# Altium PCB CC1200_wisun_st.PcbDoc
Units mil, origin at the board's own origin, x right, y up, seen from the top; angles counter-clockwise.
Board outline 700.67 x 1385.59 mil, 2 copper layers (Top Layer, Bottom Layer), stack 42.17 mil thick; 55 components, 39 nets, 194 pads, 83 vias.
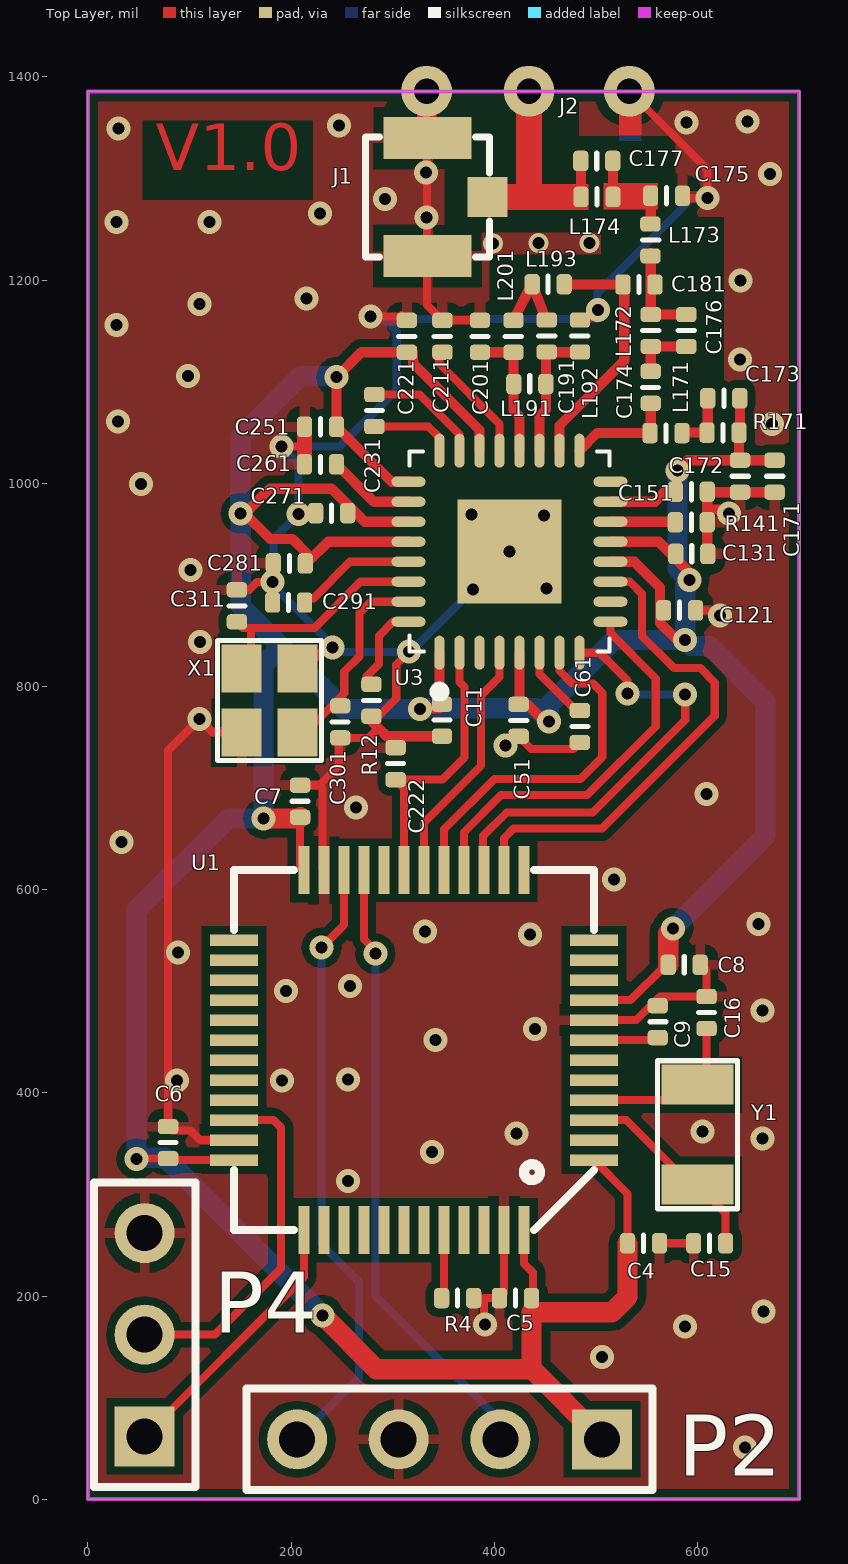
[diagram p0: Top Layer view]
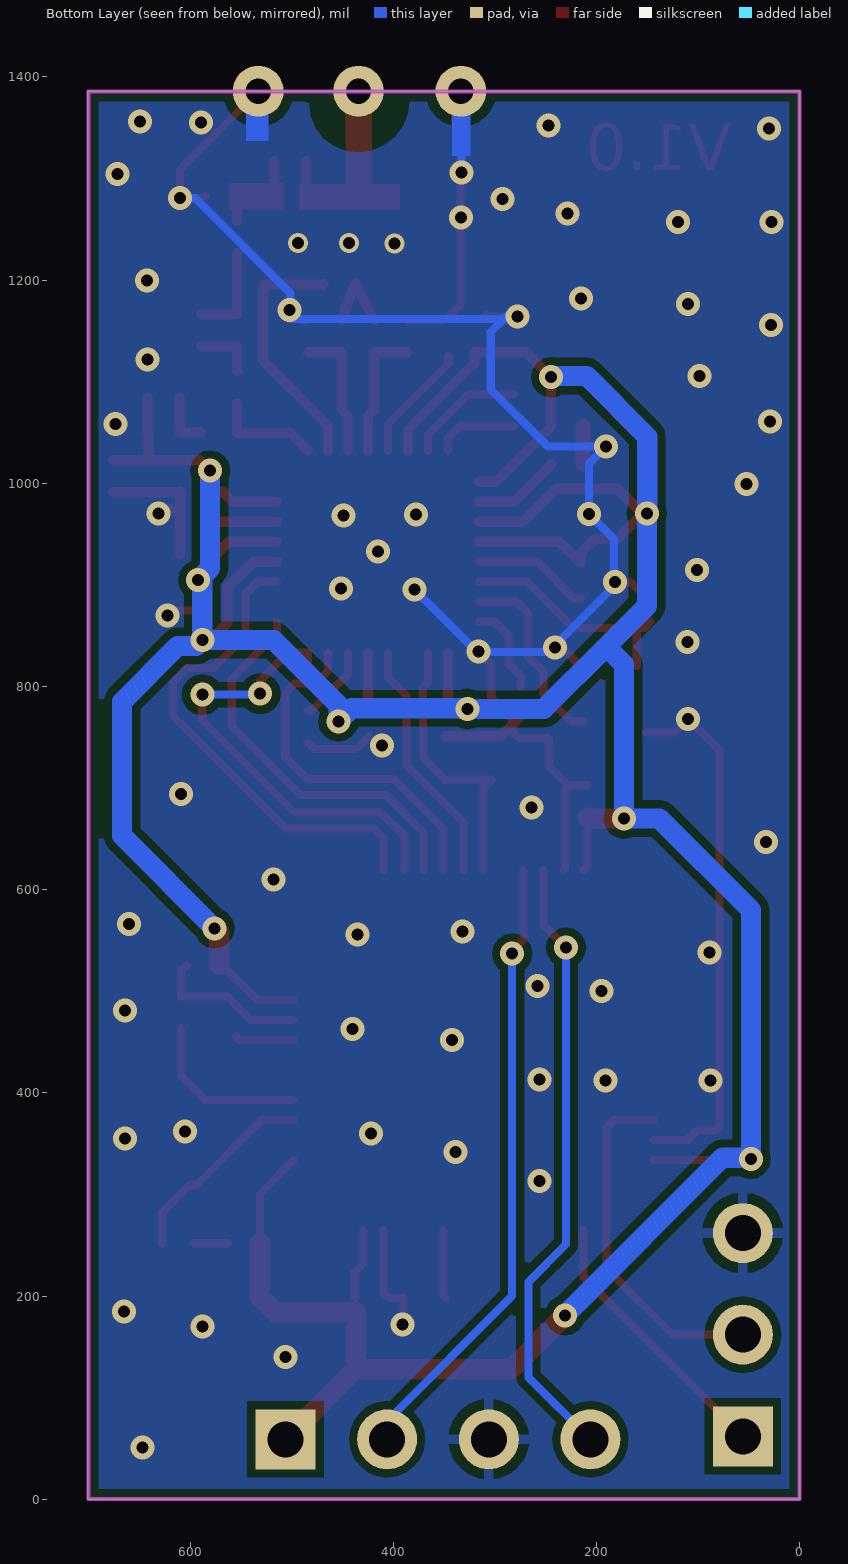
[diagram p1: Bottom Layer view, seen from below]
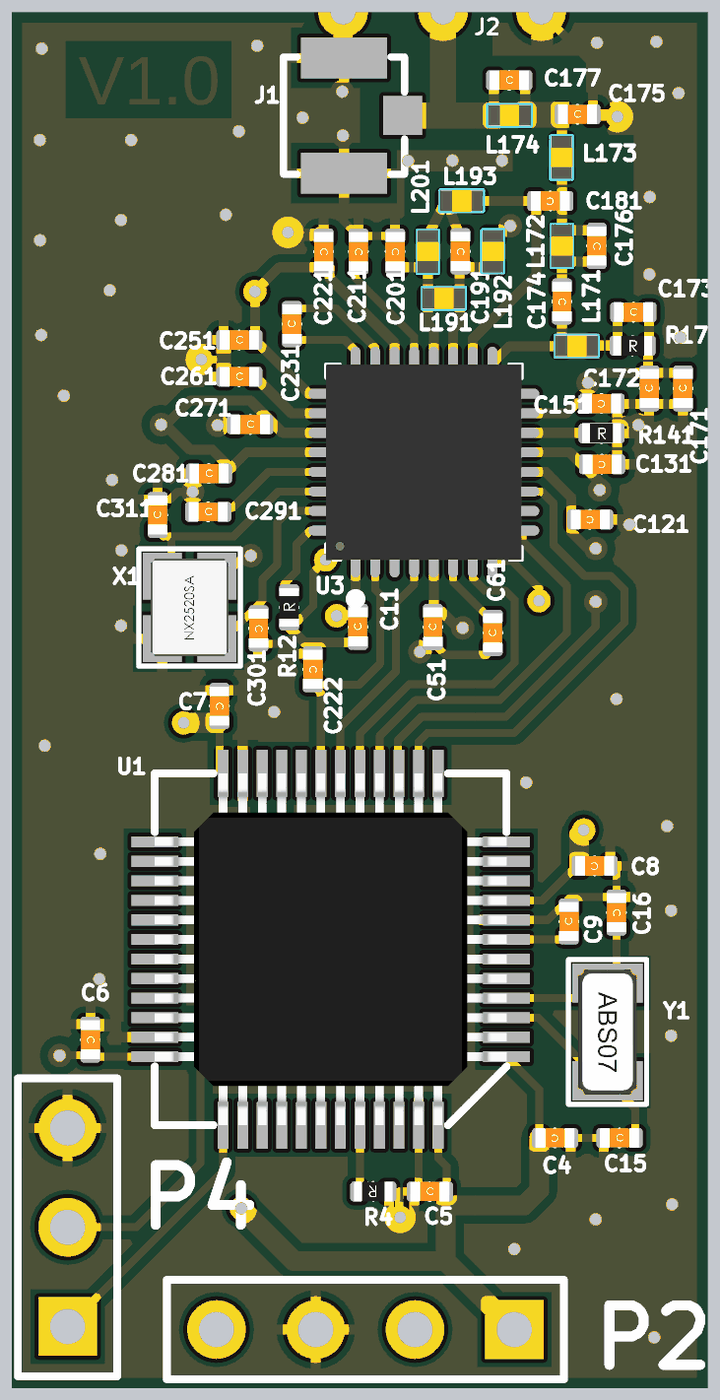
[diagram p2: 3D render of the assembled board from above, using the file's embedded part models]

## Layer stack, top to bottom
Top Solder: solder mask 0.4, Solder Resist, Dk 3.5
Top Layer: signal copper 1.4
Dielectric 1: dielectric 39.3701, FR-4, Dk 4.8
Bottom Layer: signal copper 1.4
Bottom Solder: solder mask 0.4, Solder Resist, Dk 3.5

## Board outline
0,0 700.67,0 700.67,1385.59 0,1385.59

## Design rules (kind name [scope] priority, off if disabled: settings)
Clearance [All] p1: gap=8
ComponentClearance [All] p1: gap=0 collisioncheckmode=3 verticalgap=0 showdistances=FALSE
MinimumSolderMaskSliver [All] p1: minsoldermaskwidth=3.94
PolygonConnect PolygonConnect_1 [All vs isvia] p1: connectstyle=Direct reliefconductorwidth=10 reliefentries=4 polygonreliefangle="90 Angle" airgapwidth=10
PolygonConnect [All] p2: connectstyle=Relief reliefconductorwidth=10 reliefentries=4 polygonreliefangle="90 Angle" airgapwidth=10
RoutingVias [All] p1: holewidth=11.81 width=23.62 viastyle="Through Hole" minholewidth=11.81 minwidth=23.62 maxholewidth=11.81 maxwidth=23.62
SilkToSilkClearance [All] p1: silktosilkclearance=3.94
SilkToSolderMaskClearance [IsPad] p1: minsilkscreentomaskgap=3.94 clearancetoexposedcopper=TRUE
SolderMaskExpansion Via [IsVia] p1: expansion=-19.68
SolderMaskExpansion [All] p2: expansion=4
Width [All] p1: maxlimit=30 minlimit=8 preferedwidth=19.68
26 further rules are at their usual default settings.

## Components (designator, comment, footprint, x,y, rotation, side; value= is the part's Value field where it differs from the comment)
C4 "100nF-16V" "C0402 - SMT - Rounded" 547,252 r0 top
C5 "100nF-16V" "C0402 - SMT - Rounded" 421,198 r180 top
C6 "100nF-16V" "C0402 - SMT - Rounded" 79,351 r90 top
C7 "100nF-16V" "C0402 - SMT - Rounded" 209,687 r90 top
C8 "100nF-16V" "C0402 - SMT - Rounded" 587,526 r0 top
C9 "100nF-16V" "C0402 - SMT - Rounded" 561,470 r270 top
C11 "47nF" "C0402 - SMT - Rounded" 348.56,766.77 r270 top
C15 "20p" "C0402 - SMT - Rounded" 612,252 r180 top
C16 "20p" "C0402 - SMT - Rounded" 609,479 r90 top
C51 "47nF" "C0402 - SMT - Rounded" 424,766.63 r270 top
C61 "220nF" "C0402 - SMT - Rounded" 484.34,760.65 r270 top
C121 "47nF" "C0402 - SMT - Rounded" 582.47,874.84 r0 top
C131 "47nF" "C0402 - SMT - Rounded" 594.42,930.48 r0 top
C151 "47nF" "C0402 - SMT - Rounded" 594,991.63 r0 top
C171 "10nF" "C0402 - SMT - Rounded" 676,1006.88 r270 top
C172 "100pF" "C0402 - SMT - Rounded" 642,1006.88 r270 top
C173 "56pF" "C0402 - SMT - Rounded" 626,1083.63 r180 top
C174 "39pF" "C0402 - SMT - Rounded" 554,1094.37 r90 top
C175 "6.2pF" "C0402 - SMT - Rounded" 569.66,1282.96 r180 top
C176 "2.2pF" "C0402 - SMT - Rounded" 589,1150.37 r90 top
C177 "DNM" "C0402 - SMT - Rounded" 500.91,1317.25 r180 top
C181 "5.1pF" "C0402 - SMT - Rounded" 542.37,1195.61 r0 top
C191 "5.1pF" "C0402 - SMT - Rounded" 451.71,1144.92 r90 top
C201 "5.1pF" "C0402 - SMT - Rounded" 386,1144.63 r90 top
C211 "10nF" "C0402 - SMT - Rounded" 349,1144.63 r90 top
C221 "47nF" "C0402 - SMT - Rounded" 314,1144.63 r90 top
C222 "100nF-16V" "C0402 - SMT - Rounded" 303,724 r90 top
C231 "1.5nF" "C0402 - SMT - Rounded" 282,1071.63 r270 top
C251 "47nF" "C0402 - SMT - Rounded" 229,1055.63 r180 top
C261 "47nF" "C0402 - SMT - Rounded" 229,1018.63 r180 top
C271 "47nF" "C0402 - SMT - Rounded" 240,970.63 r180 top
C281 "47nF" "C0402 - SMT - Rounded" 198.35,921.14 r180 top
C291 "47nF" "C0402 - SMT - Rounded" 197.64,882.57 r180 top
C301 "15pF" "C0402 - SMT - Rounded" 248.4,765.15 r90 top
C311 "15pF" "C0402 - SMT - Rounded" 146.73,879.38 r270 top
J1 "IPEX" IPEX 364,1281.63 r90 top
J2 "ANT" ANT 512.95,1385.85 r270 top
L171 "56nH" "L0402 - SMT - Rounded" 569,1049.37 r180 top
L172 "15nH" "L0402 - SMT - Rounded" 554,1150.37 r270 top
L173 "43nH" "L0402 - SMT - Rounded" 553.76,1239.45 r270 top
L174 "22nH" "L0402 - SMT - Rounded" 501.15,1281.84 r0 top
L191 "56nH" "L0402 - SMT - Rounded" 435,1097.63 r0 top
L192 "27nH" "L0402 - SMT - Rounded" 484.47,1144.92 r90 top
L193 "15nH" "L0402 - SMT - Rounded" 453.1,1195.9 r180 top
L201 "27nH" "L0402 - SMT - Rounded" 419,1144.63 r90 top
P2 "IO" HDR1X4 506,59 r180 top
P4 "SW_DG" HDR1X3 56,62 r90 top
R4 "10k-5%" "R0402 - SMT - Rounded" 364,198 r180 top
R12 "0R-1%" "R0402 - SMT - Rounded" 279.15,786.35 r90 top
R141 "56k" "R0402 - SMT - Rounded" 594,961.63 r0 top
R171 "18R-5%" "R0402 - SMT - Rounded" 625.25,1049.81 r0 top
U1 "STM32F103CBT6TR" TQFP-48-P0.5 321,442 r180 top
U3 "CC1200" QFN-32M 415,932.63 r0 top locked
X1 "40MHz" CRYSTAL-2.5x2-4 178.96,786.24 r90 top
Y1 "32.768KHz" Crystal-3.2x1.5 600,408 r270 top

## Footprints (in the part's own frame and the unit in brackets; to place one, negate y for a bottom-side part, rotate by r counter-clockwise, add the part's x,y. Pads: shape width x height; smd on the part's side, far side on the other; paste and mask are expansions set on the pad)
ANT [mil]
  round 50 hole 25 paste+0: 1(0,20) 2(0,-78.74) 3(0,-179.48)
"C0402 - SMT - Rounded" [mm]
  rrect50% 0.381x0.51 smd: 1(0.4,0) 2(-0.4,0)
  silkscreen extent 0,-0.2 0,0.2, body extent -0.5,-0.25 0.5,0.25, height 0.49
CRYSTAL-2.5x2-4 [mm]
  rect 1.2x1 smd: 1(-0.8,-0.7) 2(0.8,-0.7) 3(0.8,0.7) 4(-0.8,0.7)
  silkscreen extent -1.5,-1.3 1.5,1.3, body extent -1.25,-1 1.25,1, height 0.67
Crystal-3.2x1.5 [mm] "DSX321G"
  rect 1x1.8 smd: 1(0,0) 2(2.5,0)
  silkscreen extent -0.6,-1 3.1,1, body extent -0.36,-0.76 2.86,0.76, height 0.93
HDR1X3 [mm] "Connector; Header; 3 Position"
  rect 1.5x1.5 hole 0.9: 1(0,0)
  round 1.5 hole 0.9: 2(2.54,0) 3(5.08,0)
  silkscreen extent -1.27,-1.27 6.35,1.27
HDR1X4 [mm] "Connector; Header; 4 Position"
  rect 1.5x1.5 hole 0.9: 1(0,0)
  round 1.5 hole 0.9: 2(2.54,0) 3(5.08,0) 4(7.62,0)
  silkscreen extent -1.27,-1.27 8.89,1.27
IPEX [mm]
  rect 1x1 smd: 1(0,-0.75)
  rect 1.05x2.2 smd: 2(-1.475,0.75) 3(1.475,0.75)
  silkscreen extent -1.5,-0.8 1.5,2.3
"L0402 - SMT - Rounded" [mm]
  rrect50% 0.381x0.51 smd: 1(0.4,0) 2(-0.4,0)
  silkscreen extent 0,-0.2 0,0.21, body extent -0.6,-0.32 0.59,0.32, height 0.67
QFN-32M [mm]
  oval 0.254x0.85 smd: 1(-1.75,-2.525) 2(-1.25,-2.525) 3(-0.75,-2.525) 4(-0.25,-2.525) 5(0.25,-2.525) 6(0.75,-2.525) 7(1.25,-2.525) 8(1.75,-2.525) 17(1.75,2.525) 18(1.25,2.525) 19(0.75,2.525) 20(0.25,2.525) 21(-0.25,2.525) 22(-0.75,2.525) 23(-1.25,2.525) 24(-1.75,2.525)
  oval 0.85x0.254 smd: 9(2.525,-1.75) 10(2.525,-1.25) 11(2.525,-0.75) 12(2.525,-0.25) 13(2.525,0.25) 14(2.525,0.75) 15(2.525,1.25) 16(2.525,1.75) 25(-2.525,1.75) 26(-2.525,1.25) 27(-2.525,0.75) 28(-2.525,0.25) 29(-2.525,-0.25) 30(-2.525,-0.75) 31(-2.525,-1.25) 32(-2.525,-1.75)
  rect 2.6x2.6 smd: 33(0,0)
  silkscreen extent -2.5,-3.62 2.5,2.5, body extent -2.51,-2.52 2.51,2.5, height 0.8
"R0402 - SMT - Rounded" [mm]
  rrect50% 0.381x0.51 smd: 1(-0.4,0) 2(0.4,0)
  silkscreen extent 0,-0.21 0,0.2, body extent -0.5,-0.25 0.5,0.25, height 0.36
TQFP-48-P0.5 [mm] "Thin QFP, 48-Leads, Body 7x7mm, Pitch 0.5mm, IPC Medium Density"
  rect 1.2x0.28 smd: 1(-4.5,2.75) 2(-4.5,2.25) 3(-4.5,1.75) 4(-4.5,1.25) 5(-4.5,0.75) 6(-4.5,0.25) 7(-4.5,-0.25) 8(-4.5,-0.75) 9(-4.5,-1.25) 10(-4.5,-1.75) 11(-4.5,-2.25) 12(-4.5,-2.75) 25(4.5,-2.75) 26(4.5,-2.25) 27(4.5,-1.75) 28(4.5,-1.25) 29(4.5,-0.75) 30(4.5,-0.25) 31(4.5,0.25) 32(4.5,0.75) 33(4.5,1.25) 34(4.5,1.75) 35(4.5,2.25) 36(4.5,2.75)
  rect 0.28x1.2 smd: 13(-2.75,-4.5) 14(-2.25,-4.5) 15(-1.75,-4.5) 16(-1.25,-4.5) 17(-0.75,-4.5) 18(-0.25,-4.5) 19(0.25,-4.5) 20(0.75,-4.5) 21(1.25,-4.5) 22(1.75,-4.5) 23(2.25,-4.5) 24(2.75,-4.5) 37(2.75,4.5) 38(2.25,4.5) 39(1.75,4.5) 40(1.25,4.5) 41(0.75,4.5) 42(0.25,4.5) 43(-0.25,4.5) 44(-0.75,4.5) 45(-1.25,4.5) 46(-1.75,4.5) 47(-2.25,4.5) 48(-2.75,4.5)
  silkscreen extent -4.5,-4.5 4.5,4.5, body extent -4.5,-4.5 4.5,4.5, height 1.5

## Part data
C4 C5 C6 C7 C8 C9 C222: library part 100nF-16V-C0402, "CAP CER 0.1UF 16V Y5V 0402"
C11 C51 C121 C131 C151 C221 C251 C261 C271 C281 C291: library part 0.047µF-16V-C0402-10%, "CAP CER 0.047UF 16V 10% X7R 0402"
C15 C16: library part C_Dup1
C61: library part 0.22µF-10V-C0402-10%, "CAP CER 0.22UF 10V 10% X5R 0402"
C171: library part 5.0pF-50V-C0402-0.25pF, "CAP CER 10000PF 25V X7R 0402"
C172: library part 5.0pF-50V-C0402-0.25pF, "CAP CER 100PF 50V NP0 0402"
C173: library part 5.0pF-50V-C0402-0.25pF, "CAP CER 56PF 50V NP0 0402"
C174: library part 5.0pF-50V-C0402-0.25pF, "CAP CER 39PF 50V NP0 0402"
C175: library part 5.0pF-50V-C0402-0.25pF, "CAP CER 6.2PF 50V NP0 0402"
C176: library part 5.0pF-50V-C0402-0.25pF, "CAP CER 2.2PF 50V NP0 0402"
C177: library part 5.0pF-50V-C0402-0.25pF, "CAP CER 1500PF 10V U2J 0402"
C181 C191 C201: library part 5.0pF-50V-C0402-0.25pF, "CAP CER 5.1PF 50V NP0 0402"
C211: library part 10nF-16V-C0402-10%, "CAP CER 10000PF 16V 10% X7R 0402"
C231: library part 1500pF-50V-C0402-10%, "CAP CER 1500PF 50V 10% X7R 0402"
C301 C311: library part 15pF-50V-C0402-5%, "CAP CER 15PF 50V NP0 0402"
J1 J2 P4: library part "Header 3", "Header, 3-Pin"
L171 L191: library part 8.2nH-500mA-0402, "FIXED IND 56NH 200MA 1.17 OHM"
L172 L193: library part 8.2nH-500mA-0402, "FIXED IND 15NH 460MA 160 MOHM"
L173: library part 8.2nH-500mA-0402, "FIXED IND 43NH 250MA 700 MOHM"
L174: library part 8.2nH-500mA-0402, "FIXED IND 22NH 310MA 300 MOHM"
L192 L201: library part 8.2nH-500mA-0402, "FIXED IND 27NH 280MA 520 MOHM"
P2: library part "Header 4", "Header, 4-Pin"
R4: library part Res1, "RES 10K OHM 1/16W 5% 0402 SMD"
R12: library part 0.1R-1%-R0402, "RES .10 OHM 1/16W 1% 0402 SMD"
R141: library part Res1, "RES SMD 56K OHM 1% 1/16W 0402"
R171: library part 18R-5%-R0402, "RES 18 OHM 1/16W 5% 0402 SMD"
U1: library part ATmega128_4, "MCU ARM 128K FLASH/TIMER"
X1: library part "ZTA Crystal Resonator", "40MHz ±10ppm Crystal 10pF 50 Ohm -40°C ~ 85°C Surface Mount 4-SMD, No Lead (DFN, LCC)"
Y1: library part XT32.768, "Crystal 32.768KHz"

## Via types
v1: diameter 23.62, hole 11.81, Top Layer to Bottom Layer, 80 vias
v2: diameter 19.68, hole 11.81, Top Layer to Bottom Layer, 3 vias

## Nets (pads, with @x,y where several pads share a name; then routed paths per layer and width w, separated by ;. In a path a pad name is that pad's centre, name@x,y a point inside that pad or via, vN(x,y) a via of type N, cw(c..) or ccw(c..) an arc to the next point about the centre after c; other vN are vias at no path point)
3V3: C4.2 C5.2 C6.2 C7.2 C8.2 C11.2 C51.2 C121.2 C131.2 C151.2 C171.2 C172.2 C173.2 C221.2 C251.2 C271.2 C281.2 P2.1 R171.2 U1.1 U1.9 U1.24 U1.36 U1.48 U3.1 U3.5 U3.12 U3.13 U3.15 U3.22 U3.25 U3.27 U3.28 | length 4569.8
  Top Layer w8: v1(48,335) 48.25,335.25 C6.2 80.52,333.73 U1.36 ; C7.2 209,622.9 U1.24 ; U1.48 429.27,231.73 438,223 438,199.25 C5.2 ; U1.1 531.25,300.65 C4.2 ; U1.9 534.15,491.21 568.94,526 C8.2
  Top Layer w10: v1@152.3,972.25 v1@154.56,969.99 ; v1@152.64,968.06 v1@154.56,969.99 ; U3.28 236.59,942.47 215.75,921.63 215.75,930.88 201.36,945.27 179.28,945.27 v1@154.56,969.99 ; U3.27 272.47,962.15 240,994.63 179.2,994.63 v1@154.56,969.99 ; U3.25 298.85,1001.52 C251.2 v1(244.75,1104.37) 269.25,1128.88 C221.2 320,1128.88 320,1117.95 ; 320,1117.63 320,1117.95 ; v1@335.32,778.48 346.1,778.48 U3.1 ; U3.22 385.47,1052.48 320,1117.95 ; U3.5 424.84,783.22 C51.2 432.51,782.37 454.24,760.64 454,760.4 v1@455,759.4 ; U3.12 537.8,922.78 563.29,897.29 563.29,862.35 578.02,847.63 v1@592,847.63 ; U3.13 562.05,942.47 v1@595.95,908.57 ; U3.15 558.21,981.84 568,991.63 C151.2 580,993.37 580,1012.14 v1(580.33,1012.47) 590.49,1022.63 C172.2 C172.2@642.25,1022.63 ; R171.2 641,1023.88 C172.2@642.25,1022.63 ; R171.2@641.75,1049.88 C173.2 ; C171.2 C172.2@642.25,1022.63
  Top Layer w20: v1(173,670) 207.75,670 C7.2 ; v1(231,181) 284,128 436.75,128 436.75,128.25 ; P2.1 436.75,128.25 ; C4.2 531.25,199.25 516,184 436.75,184 436.75,128.25 ; C8.2 571.25,557.25 v1(576,562)
  Bottom Layer w20: v1@150,969.95 150,1045.85 209.75,1105.6 244.75,1105.6 v1(244.75,1104.37) ; v1(150.37,970.33) 150.37,879.13 190.25,839.25 ; v1(231,181) 76,336 49,336 v1(48,335) 48,580 138,670 v1(173,670) 173,822 190.25,839.25 ; v1(576,562) 667,653 667,785 612.18,839.82 593.81,839.82 v1(588,845.63) ; v1(580.33,1012.47) 580.33,916.29 v1(592,904.63) 588,900.63 v1(588,845.63) ; 190.25,839.25 251.69,777.81 v1(327.04,777.81) 327.71,778.48 441.15,778.48 v1(454,765.63) 454,781.99 517.64,845.63 v1(588,845.63)
CSN: U1.14 U3.11 | length 489.8
  Top Layer w8: U1.14 409.58,650.58 419,660 506,660 617,771 617,804 603,818 576.82,818 545.45,849.36 545.45,891.09 533.44,903.1 U3.11
GDO0: U3.10
GDO2: U1.18 U3.4 | length 244.8
  Top Layer w8: U1.18 330.84,665.84 386.92,721.92 386.92,791.14 405.16,809.38 U3.4
GND: C4.1 C5.1 C6.1 C7.1 C8.1 C9.2 C11.1 C15.1 C16.1 C51.1 C61.1 C121.1 C131.1 C151.1 C171.1 C172.1 C175.2 C201.1 C211.1 C221.1 C222.1 C251.1 C261.1 C271.1 C281.1 C291.1 C301.2 C311.2 J1.2 J1.3 J2.1 J2.3 L192.1 P2.3 P4.3 R4.1 R12.1 R141.2 U1.8 U1.23 U1.35 U1.47 U3.33 X1.2 X1.4 | length 3077.2
  Top Layer w8: U1.35 110.58,353.42 101,363 82.75,363 C6.1 79,737.1 v1(109.83,767.93) 123.02,754.75 X1.4 ; C311.2 159.12,895.12 166.62,902.63 v1(182,902.63) ; v1(190.73,1036) 211.59,1036 213.25,1037.66 ; C7.1 227.75,702.75 ; X1.2@215.56,820.12 233.84,838.41 v1(240.69,838.41) ; U1.23 231.04,620.54 231.04,699.46 227.75,702.75 ; v1(278,1164) 307.6,1164 C221.1@308.99,1165.39 ; R12.1@280.44,764.88 303.54,787.99 303.54,821.7 v1(316,834.16) ; 286.16,759.16 276.4,749.4 C301.2 247,748 247,722 227.75,702.75 ; J1.3@333.86,1339.7 333.86,1175.51 C211.1 C201.1 ; v1(391,172) 390,173 390,198 C5.1 409.58,202.33 U1.47 ; C51.1@424,750.23 C51.1 436.44,738.44 477.89,738.44 C61.1 ; L192.1 492.04,1160.67 v1(502,1170.63) ; U1.8 539.78,471.53 563,494.75 C16.1 609,519.75 C8.1 ; J2.1 609.94,1308.86 v1(609.94,1280.51) 587.85,1280.51 C175.2 ; C4.1 C15.1 ; C121.1 622.9,874.84 626,871.74 623.89,869.63 v1(622,869.63)
  Top Layer w10: R12.1@276.74,768.58 280.44,764.88 286.16,759.16 294.29,751.02 C11.1 ; C131.1 609.75,930.89 R141.2 609.75,974 ; v1(631,970) 627,974 609.75,974 ; C171.1 C172.1 610.24,991.13 C151.1 609.75,974
  Top Layer w15: C261.1 213.25,1037.66 C251.1
  Bottom Layer w8: v1(109.83,767.93) v1@113.92,763.85 ; v1(278,1164) 288.8,1164 291.18,1161.63 ; v1(332.74,1305.75) 332.74,1357.74 ; v1(379.19,895.27) 317.75,833.83 247.5,833.83 182.76,898.57 182.76,945.24 v1(207.22,969.69) 207.22,1019.51 v1(190.73,1036) 247.75,1036 304.12,1092.36 304.12,1148.68 291.18,1161.63 ; v1@501,1161.63 291.18,1161.63 ; v1@501,1170.63 501,1186.69 594.82,1280.51 v1(609.94,1280.51)
  other v1: 647,51 506,140 588,170 665,185 256,313 339,342 664,355 422,360 605,362 88,412 191,412 256,413 342,452 440,463 664,481 195,500 258,505 89,538 435,556 332,559 660,566 518,610 33,647 264,681 609,694 411,741.63 110.25,843.76 451.32,896.35 100.89,914.71 415,932.63 449.17,968.47 377.76,969.19 52.25,999.48 673.45,1058.14 29.46,1060.64 98.43,1105.62 642.06,1121.66 28.26,1155.99 109.82,1176.38 215.37,1181.78 642.53,1199.62 28,1257 120,1257 333.32,1261.54 228.56,1265.74 292.72,1279.53 671.53,1304.19 30,1349 247,1352 589.29,1355.06 649.19,1356.01
  other v2: 399,1236 443.68,1236.32 493.69,1236.31
NetC9_1: C9.1 U1.7 | length 58.3
  Top Layer w8: U1.7 551.58,451.83 C9.1@555,455.25
NetC15_2: C15.2 U1.3 Y1.2 | length 197.2
  Top Layer w8: U1.3 529.9,373.1 593.43,309.57 Y1.2 627.75,281.83 C15.2
NetC16_2: C16.2 U1.4 Y1.1 | length 167.1
  Top Layer w8: U1.4 584.79,392.79 Y1.1 609,417 C16.2
NetC61_2: C61.2 U3.6 | length 75.7
  Top Layer w8: U3.6 444.53,812.18 480.31,776.4 C61.2
NetC173_1: C173.1 L171.2 R171.1 | length 54.2
  Top Layer w10: L171.2@589.62,1050.47 590.07,1050.03 606.44,1050.03 606.66,1049.81 R171.1 ; R171.1@610,1049.63 610,1049.8 610.12,1065.64 C173.1
NetC174_1: C174.1 C176.2 L172.1 | length 59.5
  Top Layer w10: C174.1 L172.1 C176.2
NetC174_2: C174.2 L171.1 U3.17 | length 106.1
  Top Layer w10: U3.17 501.24,1049.37 L171.1 554,1050.12 C174.2
NetC175_1: C175.1 C177.2 L173.2 L174.1 | length 60.2
  Top Layer w10: L174.1@517,1281.84 C177.2@517,1317.25 ; L173.2@554,1258.12 C175.1@554,1282.96
NetC176_1: C176.1 C181.1 L172.2 L173.1 | length 95.5
  Top Layer w10: L173.1@554,1226.63 L172.2 C176.1
NetC177_1: C177.1 J1.1 J2.2 L174.2 | length 139.3
  Top Layer w10: L174.2@485.5,1281.84 C177.1@485.5,1317.25
  Top Layer w26: J2.2 434.21,1282.38 434.49,1282.1
NetC181_2: C181.2 L193.2 U3.18 | length 250.8
  Top Layer w10: U3.18 464.21,1056.84 528,1120.63 528,1190.63 C181.2@523.02,1195.61 ; L193.2 469.13,1195.61 C181.2@523.02,1195.61 ; C181.2@522.4,1196.22 C181.2@523.02,1195.61 ; C181.2 C181.2@523.02,1195.61
NetC191_1: C191.1 L193.1 L201.1 | length 79.4
  Top Layer w10: L201.1 436.98,1196.08 437.25,1196.63 437.51,1195.96 C191.1@450.99,1160.39
NetC191_2: C191.2 L191.1 L192.2 U3.19 | length 132.5
  Top Layer w10: U3.19 444.53,1066.15 451,1072.63 451,1128.88 L192.2@484,1128.88
NetC201_2: C201.2 L191.2 L201.2 U3.20 | length 132.3
  Top Layer w10: C201.2 L201.2 419,1071.63 424.84,1065.78 U3.20
NetC211_2: C211.2 U3.21 | length 118.3
  Top Layer w8: C211.2@345.87,1125.75 345.87,1117.75 405.16,1058.47 U3.21
NetC231_1: C231.1 U3.24 | length 81.5
  Top Layer w8: C231.1 335.08,1055.88 346.1,1044.86 U3.24
NetC231_2: C231.2 U3.23 | length 116.1
  Top Layer w8: C231.2 326.54,1087.37 365.79,1048.13 U3.23
NetC261_2: C261.2 U3.26 | length 86.1
  Top Layer w10: C261.2 281.54,981.84 U3.26
NetC291_2: C291.2 U3.29 | length 115.8
  Top Layer w8: C291.2@214.75,886.63 222,886.63 258.16,922.78 U3.29
NetR4_2: R4.2 U1.44 | length 67.8
  Top Layer w8: R4.2 350.53,200.28 U1.44
NetR12_2: R12.2 U3.32 | length 89.6
  Top Layer w8: R12.2@274.24,800.07 274.24,809.95 286.54,822.25 286.54,849.72 300.55,863.73 U3.32
NetR141_1: R141.1 U3.14 | length 64.1
  Top Layer w10: U3.14 577.72,962.15 R141.1
OSC1: U1.5
OSC2: U1.6
RF_RESET: C222.2 U1.19 U3.2 | length 274.8
  Top Layer w8: U1.19 311.16,700.09 C222.2 349.25,708.25 370.92,729.92 370.92,799.35 365.79,804.48 U3.2
RXD3: P2.4 U1.22 | length 609.9
  Top Layer w8: v1(230,543) 252.1,565.1 U1.22
  Bottom Layer w8: P2.4 267,120 267,214 230,251 v1(230,543)
SCLK: U1.15 U3.8 | length 448.5
  Top Layer w8: U1.15 389,620.06 389,652.63 412.37,676 497,676 588,767 v1(588,792) ; U3.8@483.9,820.71 U3.8 503.78,833.22 531,806 v1(531,793)
  Bottom Layer w8: v1(531,793) 530,792 v1(588,792)
SI: U1.17 U3.7 | length 357.6
  Top Layer w8: U1.17 350.53,659.41 400.12,709 484.75,709 506.38,730.64 506.38,793.68 497.07,803 476.69,803 464.21,815.48 U3.7
SO: U1.16 U3.9 | length 390.8
  Top Layer w8: U1.16 370.21,656.47 406.75,693 491.37,693 559,760.63 559,807.92 514.41,852.51 U3.9
TCK: P4.1 U1.37 | length 267.8
  Top Layer w8: P4.1 212.73,218.73 U1.37
TMS: P4.2 U1.34 | length 370.2
  Top Layer w8: P4.2@71,147 P4.2 125,162 190,227 190,366 182.9,373.1 U1.34
TXD3: P2.2 U1.21 | length 615.8
  Top Layer w8: U1.21 271.79,551.21 283,540 v1(283,537)
  Bottom Layer w8: v1(283,537) 283,200 406,77 P2.2
X_OSC_Q1: C311.1 U3.30 X1.3 | length 227.7
  Top Layer w8: C311.1 152.73,857.63 160.44,857.63 ; X1.3@160.44,820.12 160.44,857.63 ; U3.30 268.54,903.1 223.07,857.63 160.44,857.63
X_OSC_Q2: C301.1 U3.31 X1.1 | length 188.7
  Top Layer w8: X1.1@213.22,765.77 225.14,765.77 252.4,793.03 252.4,814.73 267.3,829.63 267.3,872.1 278.62,883.41 U3.31
pads on no net: U1.2 U1.10 U1.11 U1.12 U1.13 U1.20 U1.25 U1.26 U1.27 U1.28 U1.29 U1.30 U1.31 U1.32 U1.33 U1.38 U1.39 U1.40 U1.41 U1.42 U1.43 U1.45 U1.46 U3.3 U3.16

## Polygon pours and split planes (outlines as drawn)
GND on Top Layer "Top Layer- GND" (solid, pour order 4): 1.14,1385.59 706.75,1385.59 706.75,-0.54 1.14,-0.54
GND on Bottom Layer "Bot Layer- GND" (solid, pour order 3): 1.14,1385.59 706.75,1385.59 706.75,-0.54 1.14,-0.54

## Keep-outs
Keep-Out Layer:
  lines w3.94: 0,0 0,1385.59 700,1385.59 700,0 0,0

## Other copper
Top Layer:
  rectangle net NetC175_1: 507.76,1269.44 561.41,1295.44
  rectangle net NetC177_1: 393.49,1268.74 492.7,1294.74
  rectangle net GND: 324,1351 343,1371
  rectangle net GND: 523,1343 545,1370
  pour cut-out: 316.08,1031.34 316.08,834.6 512.82,834.6 512.82,1031.34
  pour cut-out: 626.31,1041.58 626.31,1262.16 578.53,1262.16 578.53,1342.18 483.81,1342.18 483.81,1386.08 389.1,1386.08 389.1,1342.18 350.72,1342.18 350.72,1246.61 504.63,1246.61 504.63,1225.49 395.17,1225.49 395.17,1041.58
  text "V1.0" at 67,1293 h78.74
Bottom Layer:
  rectangle net GND: 324,1322 342,1373.85
  rectangle net GND: 523,1337 545,1377
  pour cut-out: 384,1385.59 384,1377 ccw(c435,1377) 435,1326 ccw(c435,1374) 483,1374 483,1385